# Altium PCB LEDCUBE.PcbDoc (part 2 of 2)
Units mm, origin at the board's own origin, x right, y up, seen from the top; angles counter-clockwise.
Board outline 150 x 150 mm, 2 copper layers (Top Layer, Bottom Layer); 119 components, 223 nets, 564 pads, 151 vias.
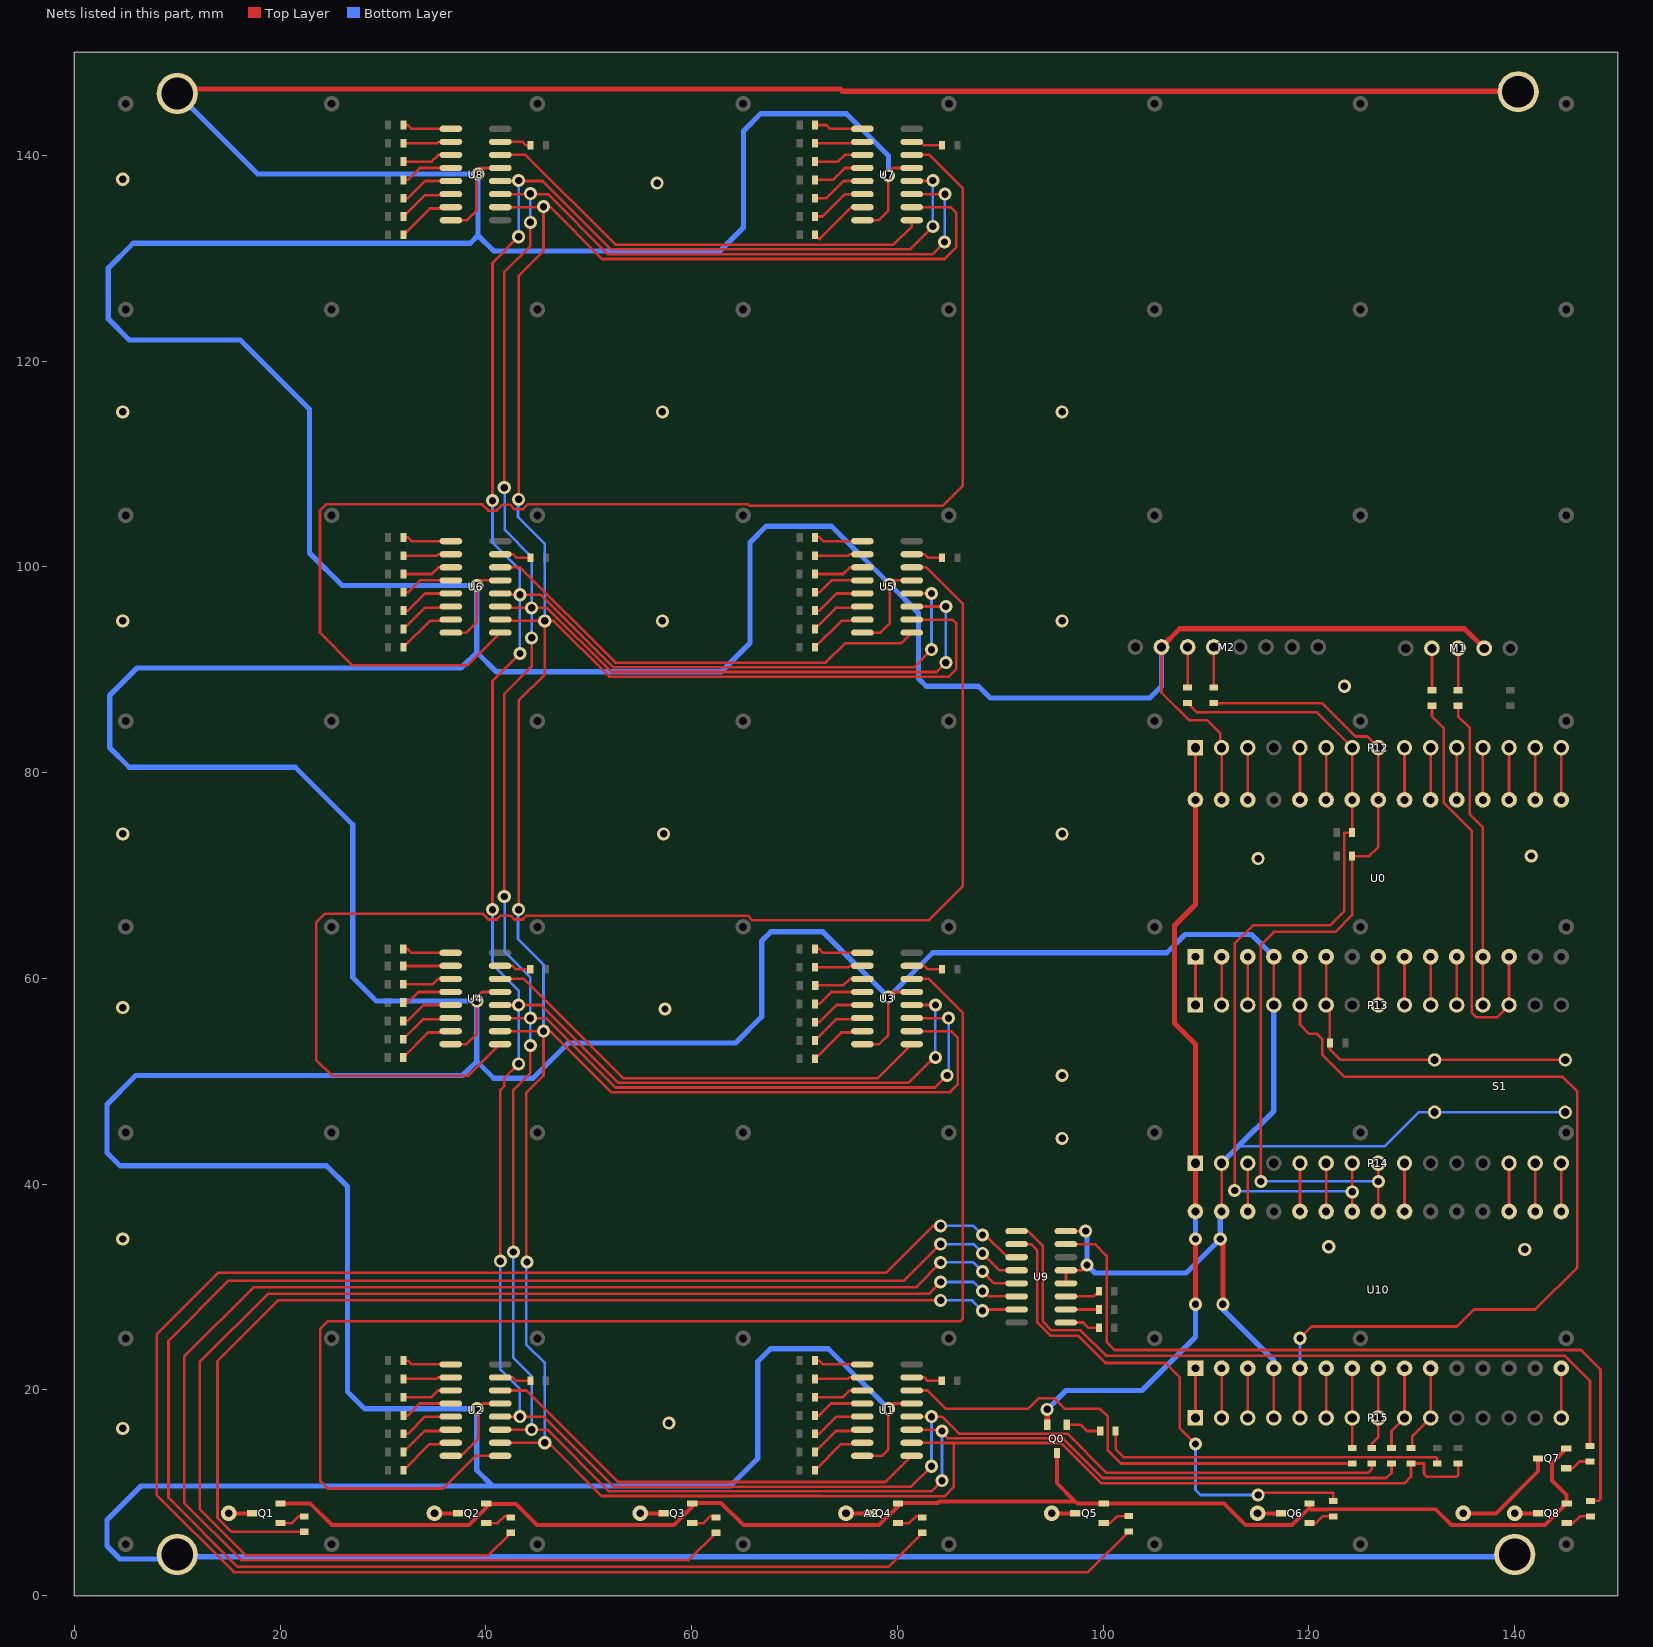
[diagram p2: the nets of this part, all layers, seen from the top]

## Via types
v1: diameter 1.27, hole 0.711, Top Layer to Bottom Layer, tented both sides, 151 vias

## Nets (pads, with @x,y where several pads share a name; then routed paths per layer and width w, separated by ;. In a path a pad name is that pad's centre, name@x,y a point inside that pad or via, vN(x,y) a via of type N, cw(c..) or ccw(c..) an arc to the next point about the centre after c; other vN are vias at no path point) (continued)
GND: M1.4 M2.2 P12.2 P13.4 P14.2 P15.4 pad.0 S1.1 U0.4 U0.29 U1.8 U1.13 U2.8 U2.13 U3.8 U3.13 U4.8 U4.13 U5.8 U5.13 U6.8 U6.13 U7.8 U7.13 U8.8 U8.13 U9.4 U9.5 U9.8 U10.4 U10.29 | length 1189.2
  Top Layer w0.254: U4.8@36.576,53.594 38.1,53.594 39.116,54.61 v1(39.116,57.785) 39.116,58.166 39.624,58.674 U4.13@41.376,58.674 ; U2.8@36.589,13.589 37.592,13.589 39.243,15.24 39.243,18.161 39.751,18.669 U2.13@41.389,18.669 ; U6.8@36.602,93.599 38.1,93.599 39.116,94.615 v1(39.116,98.171) 39.116,98.298 39.497,98.679 U6.13@41.402,98.679 ; U8.8@36.602,133.683 38.179,133.683 39.116,134.62 39.116,138.43 39.449,138.763 U8.13@41.402,138.763 ; U1.8@76.581,13.589 78.486,13.589 79.121,14.224 v1(79.121,18.161) 79.629,18.669 U1.13@81.381,18.669 ; U3.8@76.594,53.594 78.232,53.594 79.121,54.483 v1(79.121,58.166) 79.121,58.293 79.502,58.674 U3.13@81.394,58.674 ; U5.8@76.594,93.599 78.359,93.599 79.248,94.488 v1(79.248,98.298) 79.629,98.679 U5.13@81.394,98.679 ; U7.8@76.594,133.683 78.184,133.683 79.121,134.62 v1(79.121,138.049) 79.121,138.303 79.581,138.763 U7.13@81.394,138.763 ; U9.4@96.38,30.353 U9.5@96.38,31.623 97.917,31.623 v1(98.425,32.131) ; U9.8@96.38,35.433 v1(98.298,35.433) ; M2.2@105.664,92.202 105.664,87.757 108.331,85.09 110.109,85.09 111.379,83.82 111.379,82.55 P12.2@111.506,82.423 ; U10.29@111.506,37.338 P14.2@111.506,42.037 ; U0.29@111.506,77.343 P12.2@111.506,82.169 ; P15.4@116.586,17.272 U10.4@116.586,22.098 ; P13.4@116.586,57.404 U0.4@116.586,62.103
  Top Layer w0.508: pad.0@10,146 10.44,146.44 74.413,146.44 74.637,146.216 140.335,146.216 pad.0@140.335,146.177 ; M2.2@105.664,92.202 107.442,93.98 135.128,93.98 M1.4@137.033,92.075 ; v1@111.379,34.29 111.633,34.036 v1(111.633,28.321)
  Bottom Layer w0.254: 113.03,43.561 113.157,43.688 127.381,43.688 130.683,46.99 S1.1@132.207,46.99 S1.1@144.907,46.99
  Bottom Layer w0.508: pad.0@10,146.216 pad.0@10,146 17.824,138.176 v1(39.243,138.176) 39.243,132.207 ; v1(79.121,18.161) 73.279,24.003 67.675,24.003 66.421,22.749 66.421,13.335 63.754,10.668 40.64,10.668 ; v1(79.121,138.049) 79.121,139.954 75.048,144.027 66.684,144.027 65.024,142.367 65.024,132.969 62.738,130.683 40.767,130.683 39.243,132.207 ; v1(98.298,35.433) 98.425,35.306 v1(98.425,32.131) 99.187,31.369 108.077,31.369 v1(111.379,34.671) 111.379,37.211 U10.29@111.506,37.338 ; M2.2@105.664,92.202 105.664,88.392 104.521,87.249 89.027,87.249 87.884,88.392 82.804,88.392 82.042,89.154 82.042,95.504 v1(79.248,98.298) 73.603,103.943 67.24,103.943 65.659,102.362 65.659,92.583 62.865,89.789 41.021,89.789 39.116,91.694 ; P14.2@111.506,42.037 113.03,43.561 ; v1(111.633,28.321) 111.633,27.813 116.586,22.86 U10.4@116.586,22.098 ; 113.157,43.688 116.586,47.117 P13.4@116.586,57.404 ; U0.4@116.586,62.103 114.427,64.262 107.95,64.262 106.172,62.484 83.439,62.484 v1(79.121,58.166) 72.771,64.516 67.691,64.516 66.802,63.627 66.802,56.261 64.262,53.721 48.006,53.721 44.577,50.292 40.767,50.292 39.116,51.943 ; pad.0@139.134,147.378 pad.0@140.335,146.177 ; pad.0@140,4 140,3.784 10.216,3.784 pad.0@10,4 10,3.556 4.445,3.556 3.175,4.826 3.175,7.366 6.477,10.668 40.64,10.668 ; 39.116,51.943 v1(39.116,57.785) 29.337,57.785 27.051,60.071 27.051,74.93 21.463,80.518 5.334,80.518 3.429,82.423 3.429,87.503 6.096,90.17 37.592,90.17 39.116,91.694 ; 39.116,51.943 37.719,50.546 5.969,50.546 3.175,47.752 3.175,43.053 4.445,41.783 24.511,41.783 26.543,39.751 26.543,19.812 28.194,18.161 v1(39.116,18.161) 39.116,12.192 40.64,10.668 ; 39.116,91.694 v1(39.116,98.171) 26.035,98.171 22.86,101.346 22.86,115.316 16.129,122.047 5.334,122.047 3.302,124.079 3.302,129.032 5.715,131.445 38.481,131.445 39.243,132.207
  other v1: 4.699,16.256 57.785,16.764 140.97,33.655 121.92,33.909 4.699,34.671 96.012,44.45 96.012,50.546 57.404,57.023 4.699,57.15 115.062,71.628 141.605,71.882 4.699,74.041 57.277,74.041 96.012,74.041 123.444,88.392 4.699,94.742 57.15,94.742 96.012,94.742 4.699,115.062 57.15,115.062 96.012,115.062 56.642,137.287 4.699,137.668
INT_DATA: P13.5 P15.5 U0.5 U10.5 | length 91.8
  Top Layer w0.254: P15.5@119.126,17.272 U10.5@119.126,22.098 ; v1(119.126,25.019) 120.269,26.162 134.366,26.162 136.017,27.813 141.986,27.813 146.089,31.916 146.089,48.983 144.653,50.419 123.444,50.419 121.285,52.578 121.285,54.102 120.777,54.61 120.015,54.61 119.126,55.499 P13.5@119.126,57.404 U0.5@119.126,62.103
  Bottom Layer w0.254: U10.5@119.126,22.098 v1(119.126,25.019)
INT_KEY: P13.6 R01.1 S1.2 U0.6 | length 32.8
  Top Layer w0.254: U0.6@121.666,62.103 P13.6@121.666,57.404 122.035,57.035 R01.1@122.035,53.34 ; R01.1@122.047,53.721 122.047,53.086 123.063,52.07 S1.2@132.207,52.07 S1.2@144.907,52.07
L1: A2.1 Q1.2 | length 2.3
  Top Layer w0.381: A2.1@15,8 A2.1@15,8 Q1.2@17.294,8.001
L2: A2.2 Q2.2 | length 2.3
  Top Layer w0.381: A2.2@35,8 A2.2@35,8 Q2.2@37.294,8.001
L3: A2.3 Q3.2 | length 2.3
  Top Layer w0.381: A2.3@55,8 A2.3@55,8 Q3.2@57.294,8.001
L4: A2.4 Q4.2 | length 2.3
  Top Layer w0.381: A2.4@75,8 A2.4@75,8 Q4.2@77.294,8.001
L5: A2.5 Q5.2 | length 2.3
  Top Layer w0.381: A2.5@95,8 A2.5@95,8 Q5.2@97.294,8.001
L6: A2.6 Q6.2 | length 2.3
  Top Layer w0.381: A2.6@115,8 A2.6@115,8 Q6.2@117.294,8.001
L7: A2.7 Q7.2 | length 10.2
  Top Layer w0.381: A2.7@135,8 138.175,8 142.262,12.087 Q7.2@142.262,13.335
L8: A2.8 Q8.2 | length 2.3
  Top Layer w0.381: A2.8@140,8 140.001,8.001 Q8.2@142.294,8.001
L_CTL1: Rl1.2 U9.15 | length 104.9
  Top Layer w0.254: Rl1.2@22.352,6.206 15.254,6.206 13.911,7.549 13.911,22.801 19.812,28.702 v1(84.201,28.702) ; v1(88.265,27.686) 88.265,27.813 U9.15@91.58,27.813
  Bottom Layer w0.254: v1(84.201,28.702) 87.249,28.702 v1(88.265,27.686)
L_CTL2: Rl2.2 U9.14 | length 130.5
  Top Layer w0.254: Rl2.2@42.418,6.108 40.221,3.911 16.663,3.911 12.192,8.382 12.192,22.733 18.796,29.337 83.058,29.337 v1(84.201,30.48) ; v1(88.265,29.591) 88.773,29.083 U9.14@91.58,29.083
  Bottom Layer w0.254: v1(84.201,30.48) 87.376,30.48 v1(88.265,29.591)
L_CTL3: Rl3.2 U9.13 | length 154.9
  Top Layer w0.254: Rl3.2@62.357,6.108 59.706,3.457 16.228,3.457 10.668,9.017 10.668,23.241 17.399,29.972 81.788,29.972 v1(84.201,32.385) ; v1(88.265,31.496) 89.408,30.353 U9.13@91.58,30.353
  Bottom Layer w0.254: v1(84.201,32.385) 87.376,32.385 v1(88.265,31.496)
L_CTL4: Rl4.2 U9.12 | length 180.1
  Top Layer w0.254: Rl4.2@82.423,6.108 79.109,2.794 15.875,2.794 9.144,9.525 9.144,24.765 14.986,30.607 80.645,30.607 v1(84.201,34.163) ; v1(88.265,33.274) 89.916,31.623 U9.12@91.58,31.623
  Bottom Layer w0.254: v1(84.201,34.163) 87.376,34.163 v1(88.265,33.274)
L_CTL5: Rl5.2 U9.11 | length 204.1
  Top Layer w0.254: v1(84.201,35.941) 83.439,35.941 78.867,31.369 13.97,31.369 8.001,25.4 8.001,9.779 15.494,2.286 98.54,2.286 Rl5.2@102.489,6.235 ; v1(88.265,35.052) 88.519,35.052 90.678,32.893 U9.11@91.58,32.893
  Bottom Layer w0.254: v1(84.201,35.941) 87.376,35.941 v1(88.265,35.052)
L_CTL6: Rl6.2 U9.10 | length 51.3
  Top Layer w0.254: U9.10@91.58,34.163 92.964,34.163 93.599,33.528 93.599,26.536 94.862,25.273 97.536,25.273 100.203,22.606 106.045,22.606 107.442,21.209 107.442,16.256 v1(108.966,14.732) ; v1(115.062,9.779) 115.265,9.982 122.352,9.982 Rl6.2@122.352,9.206
  Bottom Layer w0.254: v1(108.966,14.732) 108.966,10.287 109.474,9.779 v1(115.062,9.779)
L_CTL7: Rl7.2 U9.9 | length 72.4
  Top Layer w0.254: U9.9@91.58,35.433 92.71,35.433 94.107,34.036 94.107,26.67 94.996,25.781 97.79,25.781 100.252,23.319 144.845,23.319 147.32,20.844 Rl7.2@147.32,14.54
L_CTL8: Rl8.2 U9.7 | length 75.6
  Top Layer w0.254: U9.7@96.38,34.163 99.187,34.163 100.33,33.02 100.33,24.638 101.092,23.876 146.431,23.876 148.336,21.971 148.336,9.398 148.144,9.206 Rl8.2@147.352,9.206
NetJP1_1: JP1.1 U1.11 U2.11 U3.11 U4.11 U5.11 U6.11 U7.11 U8.11 | length 391.5
  Top Layer w0.254: U4.11@41.376,56.134 v1(44.323,56.134) 45.847,56.134 52.597,49.384 83.674,49.384 v1(84.836,50.546) ; U2.11@41.389,16.129 v1(44.45,16.129) 45.967,16.129 51.955,10.141 83.293,10.141 v1(84.328,11.176) ; U6.11@41.402,96.139 41.529,96.012 v1(44.45,96.012) 45.96,96.012 52.202,89.77 83.801,89.77 v1(84.709,90.678) ; U8.11@41.402,136.223 46.022,136.223 51.87,130.375 83.385,130.375 v1(84.582,131.572) ; v1(41.783,67.945) 41.783,87.63 44.45,90.297 v1(44.45,93.091) ; v1(41.783,107.696) 41.783,128.651 44.323,131.191 v1(44.323,133.477) ; v1(42.672,33.401) 42.672,49.149 44.323,50.8 v1(44.323,53.467) ; U1.11@81.381,16.129 84.074,16.129 84.909,15.294 96.085,15.294 99.949,11.43 127.508,11.43 128.016,11.938 JP1.1@128.016,12.839 ; U3.11@81.394,56.134 v1(84.963,56.134) ; U5.11@81.394,96.139 v1(84.709,96.139) ; U7.11@81.394,136.223 v1(84.63,136.223)
  Bottom Layer w0.254: v1@41.846,68.135 41.846,62.547 44.323,60.071 v1(44.323,56.134) v1(44.323,53.467) ; v1@41.846,107.759 41.846,103.569 44.45,100.965 v1(44.45,96.012) v1(44.45,93.091) ; v1(42.672,33.401) 42.672,23.114 44.45,21.336 v1(44.45,16.129) ; v1(44.323,133.477) v1(44.323,136.271) ; v1(84.328,11.176) v1(84.328,16.002) ; v1(84.582,131.572) 84.582,136.176 v1(84.63,136.223) ; v1(84.709,90.678) v1(84.709,96.139) ; v1(84.836,50.546) 84.982,50.692 84.982,56.115 v1(84.963,56.134)
NetJP2_1: JP2.1 U1.12 U2.12 U3.12 U4.12 U5.12 U6.12 U7.12 U8.12 | length 383.2
  Top Layer w0.254: v1(40.64,66.675) 40.64,88.9 v1(43.307,91.567) ; v1(40.64,106.426) 40.64,129.54 v1(43.18,132.08) ; U4.12@41.376,57.404 v1(43.18,57.404) 45.339,57.404 52.905,49.838 81.08,49.838 83.566,52.324 v1(83.693,52.324) ; U2.12@41.389,17.399 v1(43.307,17.399) 45.586,17.399 52.39,10.595 81.334,10.595 v1(83.312,12.573) ; v1(41.402,32.512) 41.402,49.149 41.783,49.53 41.783,50.292 v1(43.18,51.689) ; U6.12@41.402,97.409 41.529,97.282 v1(43.307,97.282) 45.332,97.282 52.39,90.224 81.588,90.224 v1(83.312,91.948) ; U8.12@41.402,137.493 45.514,137.493 52.153,130.854 81.197,130.854 v1(83.439,133.096) ; U7.12@81.013,137.493 U7.12@81.394,137.493 v1@83.439,137.493 ; U1.12@81.381,17.399 v1(83.312,17.399) 84.328,17.399 85.979,15.748 96.52,15.748 100.33,11.938 125.73,11.938 126.111,12.319 JP2.1@126.111,12.839 ; U3.12@81.394,57.404 v1(83.693,57.404) ; U5.12@81.394,97.409 v1@83.058,97.409
  Bottom Layer w0.254: v1(40.64,66.675) 40.64,61.341 43.18,58.801 v1(43.18,57.404) v1(43.18,51.689) ; v1(40.64,106.426) 40.64,102.362 43.307,99.695 v1(43.307,97.282) v1(43.307,91.567) ; v1(41.402,32.512) 41.402,21.971 43.307,20.066 v1(43.307,17.399) ; v1(43.18,132.08) v1(43.18,137.541) ; v1(83.312,12.573) v1(83.312,17.399) ; v1(83.312,91.948) v1(83.312,97.409) ; v1(83.439,133.096) v1(83.439,137.541) ; v1(83.693,52.324) v1(83.693,57.404)
NetJP3_1: JP3.1 R0.1 U1.10 U2.10 U3.10 U4.10 U5.10 U6.10 U7.10 U8.10 | length 401.8
  Top Layer w0.254: U4.10@41.376,54.864 v1(45.593,54.864) ; U2.10@41.389,14.859 v1(45.72,14.859) 46.08,14.859 51.252,9.687 72.609,9.687 72.644,9.652 78.486,9.652 78.504,9.67 84.6,9.67 85.471,10.541 85.471,14.84 ; U6.10@41.402,94.869 41.529,94.742 v1(45.72,94.742) ; U8.10@41.402,134.953 v1@45.593,134.953 ; v1(43.18,66.675) 43.18,86.995 45.72,89.535 v1(45.72,94.742) ; v1(43.18,106.553) 43.18,128.27 45.593,130.683 v1@45.593,134.953 ; v1(43.99,32.433) 43.911,32.512 43.911,48.864 45.593,50.546 v1(45.593,54.864) ; v1(45.593,135.001) v1@45.593,134.953 ; 46.254,134.953 51.287,129.921 84.582,129.921 85.725,131.064 85.725,134.366 85.138,134.953 U7.10@81.394,134.953 ; U1.10@81.381,14.859 84.201,14.859 84.22,14.84 85.471,14.84 ; U3.10@81.394,54.864 85.217,54.864 85.852,54.229 85.852,49.657 85.125,48.93 52.141,48.93 46.207,54.864 v1(45.593,54.864) ; U5.10@81.394,94.869 85.344,94.869 85.725,94.488 85.725,90.043 84.998,89.316 52.014,89.316 46.588,94.742 v1(45.72,94.742) ; R0.1@134.493,12.839 134.493,11.684 134.366,11.557 131.445,11.557 131.179,11.823 131.179,12.839 JP3.1@129.921,12.839 129.921,11.557 129.286,10.922 99.815,10.922 95.897,14.84 85.471,14.84
  Bottom Layer w0.254: v1@43.116,66.675 43.116,63.817 45.593,61.341 v1(45.593,54.864) ; v1@43.116,106.489 43.116,104.838 45.72,102.235 v1(45.72,94.742) ; v1(43.99,32.433) 43.911,32.354 43.911,24.415 45.72,22.606 v1(45.72,14.859)
NetJP4_1: JP4.1 U1.14 | length 48.5
  Top Layer w0.254: U1.14@81.381,19.939 82.931,19.939 84.709,18.161 92.71,18.161 93.726,19.177 95.25,19.177 96.266,18.161 99.695,18.161 100.457,17.399 100.457,14.097 101.715,12.839 JP4.1@124.206,12.839
NetJP5_1: JP5.1 U9.1 | length 3.4
  Top Layer w0.254: U9.1@96.38,26.543 98.044,26.543 98.552,26.035 JP5.1@99.58,26.035
NetJP6_1: JP6.1 U9.2 | length 3.2
  Top Layer w0.254: U9.2@96.38,27.813 JP6.1@99.58,27.813
NetJP7_1: JP7.1 U9.3 | length 3.4
  Top Layer w0.254: U9.3@96.38,29.083 99.072,29.083 JP7.1@99.58,29.591
NetJP8_1: JP8.1 R02.2 | length 33.9
  Top Layer w0.254: R02.2@101.207,16.002 101.207,14.236 101.977,13.466 132.33,13.466 132.461,13.335 JP8.1@132.461,12.839
NetJP10_1: JP10.1 M1.2 | length 4.1
  Top Layer w0.254: JP10.1@131.953,87.999 M1.2@131.953,92.075
NetJP11_1: JP11.1 M1.3 | length 4.1
  Top Layer w0.254: JP11.1@134.493,87.999 M1.3@134.493,92.075
NetJP12_1: JP12.1 M2.3 | length 3.9
  Top Layer w0.254: JP12.1@108.204,88.253 M2.3@108.204,92.202
NetJP13_1: JP13.1 M2.4 | length 3.9
  Top Layer w0.254: JP13.1@110.744,88.253 M2.4@110.744,92.202
NetP12_3: P12.3 U0.28 | length 4.8
  Top Layer w0.254: U0.28@114.046,77.343 P12.3@114.046,82.169
NetP12_5: P12.5 U0.26 | length 4.8
  Top Layer w0.254: U0.26@119.126,77.343 P12.5@119.126,82.169
NetP12_6: P12.6 U0.25 | length 4.8
  Top Layer w0.254: U0.25@121.666,77.343 P12.6@121.666,82.169
NetP12_9: P12.9 U0.22 | length 4.8
  Top Layer w0.254: U0.22@129.286,77.343 P12.9@129.286,82.169
NetP12_10: P12.10 U0.21 | length 4.8
  Top Layer w0.254: U0.21@131.826,77.343 P12.10@131.826,82.169
NetP12_11: P12.11 U0.20 | length 4.8
  Top Layer w0.254: U0.20@134.366,77.343 P12.11@134.366,82.169
NetP12_12: P12.12 U0.19 | length 4.8
  Top Layer w0.254: U0.19@136.906,77.343 P12.12@136.906,82.169
NetP12_13: P12.13 U0.18 | length 4.8
  Top Layer w0.254: U0.18@139.446,77.343 P12.13@139.446,82.169
NetP12_14: P12.14 U0.17 | length 4.8
  Top Layer w0.254: U0.17@141.986,77.343 P12.14@141.986,82.169
NetP12_15: P12.15 U0.16 | length 4.8
  Top Layer w0.254: U0.16@144.526,77.343 P12.15@144.526,82.169
NetP13_1: P13.1 U0.1 | length 4.7
  Top Layer w0.254: P13.1@108.966,57.404 U0.1@108.966,62.103
NetP13_2: P13.2 U0.2 | length 4.7
  Top Layer w0.254: P13.2@111.506,57.404 U0.2@111.506,62.103
NetP13_3: P13.3 U0.3 | length 4.7
  Top Layer w0.254: P13.3@114.046,57.404 U0.3@114.046,62.103
NetP13_8: P13.8 U0.8 | length 4.7
  Top Layer w0.254: P13.8@126.746,57.404 U0.8@126.746,62.103
NetP13_9: P13.9 U0.9 | length 4.7
  Top Layer w0.254: P13.9@129.286,57.404 U0.9@129.286,62.103
NetP13_10: P13.10 U0.10 | length 4.7
  Top Layer w0.254: P13.10@131.826,57.404 U0.10@131.826,62.103
NetP13_11: P13.11 U0.11 | length 4.7
  Top Layer w0.254: P13.11@134.366,57.404 U0.11@134.366,62.103
NetP14_3: P14.3 U10.28 | length 4.7
  Top Layer w0.254: U10.28@114.046,37.338 P14.3@114.046,42.037
NetP14_5: P14.5 U10.26 | length 4.7
  Top Layer w0.254: U10.26@119.126,37.338 P14.5@119.126,42.037
NetP14_6: P14.6 U10.25 | length 4.7
  Top Layer w0.254: U10.25@121.666,37.338 P14.6@121.666,42.037
NetP14_9: P14.9 U10.22 | length 4.7
  Top Layer w0.254: U10.22@129.286,37.338 P14.9@129.286,42.037
NetP14_13: P14.13 U10.18 | length 4.7
  Top Layer w0.254: U10.18@139.446,37.338 P14.13@139.446,42.037
NetP14_14: P14.14 U10.17 | length 4.7
  Top Layer w0.254: U10.17@141.986,37.338 P14.14@141.986,42.037
NetP14_15: P14.15 U10.16 | length 4.7
  Top Layer w0.254: U10.16@144.526,37.338 P14.15@144.526,42.037
NetP15_1: P15.1 U10.1 | length 4.8
  Top Layer w0.254: P15.1@108.966,17.272 U10.1@108.966,22.098
NetP15_2: P15.2 U10.2 | length 4.8
  Top Layer w0.254: P15.2@111.506,17.272 U10.2@111.506,22.098
NetP15_3: P15.3 U10.3 | length 4.8
  Top Layer w0.254: P15.3@114.046,17.272 U10.3@114.046,22.098
NetP15_6: P15.6 U10.6 | length 4.8
  Top Layer w0.254: P15.6@121.666,17.272 U10.6@121.666,22.098
NetP15_15: P15.15 U10.15 | length 4.8
  Top Layer w0.254: P15.15@144.526,17.272 U10.15@144.526,22.098
NetQ0_1: Q0.1 R02.1 | length 3.5
  Top Layer w0.254: Q0.1@96.454,16.615 97.79,16.615 98.403,16.002 R02.1@99.707,16.002
NetQ1_1: Q1.1 Rl1.1 | length 2.6
  Top Layer w0.254: Q1.1@20.044,7.051 21.145,7.051 21.8,7.706 Rl1.1@22.352,7.706
NetQ2_1: Q2.1 Rl2.1 | length 2.6
  Top Layer w0.254: Q2.1@40.044,7.051 41.145,7.051 41.8,7.706 Rl2.1@42.352,7.706
NetQ3_1: Q3.1 Rl3.1 | length 2.6
  Top Layer w0.254: Q3.1@60.044,7.051 61.145,7.051 61.8,7.706 Rl3.1@62.352,7.706
NetQ4_1: Q4.1 Rl4.1 | length 2.6
  Top Layer w0.254: Q4.1@80.044,7.051 81.145,7.051 81.8,7.706 Rl4.1@82.352,7.706
NetQ5_1: Q5.1 Rl5.1 | length 2.6
  Top Layer w0.254: Q5.1@100.044,7.051 100.671,7.051 101.326,7.706 Rl5.1@102.352,7.706
NetQ6_1: Q6.1 Rl6.1 | length 2.6
  Top Layer w0.254: Q6.1@120.044,7.051 120.671,7.051 121.326,7.706 Rl6.1@122.352,7.706
NetQ7_1: Q7.1 Rl7.1 | length 2.6
  Top Layer w0.254: Q7.1@145.012,12.385 145.639,12.385 146.294,13.04 Rl7.1@147.32,13.04
NetQ8_1: Q8.1 Rl8.1 | length 2.6
  Top Layer w0.254: Q8.1@145.044,7.051 145.671,7.051 146.326,7.706 Rl8.1@147.352,7.706
NetR1_2: R1.2 U1.15 | length 3.1
  Top Layer w0.254: U1.15@81.381,21.209 82.608,21.209 82.941,20.876 R1.2@84.314,20.876
NetR2_2: R2.2 U1.1 | length 4.8
  Top Layer w0.254: R2.2@71.971,22.844 72.398,22.844 72.763,22.479 U1.1@76.581,22.479
NetR3_2: R3.2 U1.2 | length 4.7
  Top Layer w0.254: R3.2@71.971,21.066 75.211,21.066 75.354,21.209 U1.2@76.581,21.209
NetR4_2: R4.2 U1.3 | length 4.9
  Top Layer w0.254: R4.2@71.971,19.288 74.703,19.288 75.354,19.939 U1.3@76.581,19.939
NetR5_2: R5.2 U1.4 | length 5.1
  Top Layer w0.254: R5.2@71.971,17.51 72.398,17.51 73.557,18.669 U1.4@76.581,18.669
NetR6_2: R6.2 U1.5 | length 5.3
  Top Layer w0.254: R6.2@71.971,15.732 72.398,15.732 74.065,17.399 U1.5@76.581,17.399
NetR7_2: R7.2 U1.6 | length 5.5
  Top Layer w0.254: R7.2@71.971,13.954 74.019,16.002 76.454,16.002 U1.6@76.581,16.129
NetR8_2: R8.2 U1.7 | length 5.7
  Top Layer w0.254: R8.2@71.971,12.176 74.527,14.732 76.454,14.732 U1.7@76.581,14.859
NetR9_2: R9.2 U2.15 | length 3.1
  Top Layer w0.254: U2.15@41.389,21.209 42.616,21.209 42.949,20.876 R9.2@44.322,20.876
NetR10_2: R10.2 U2.1 | length 4.8
  Top Layer w0.254: R10.2@31.979,22.844 32.406,22.844 32.771,22.479 U2.1@36.589,22.479
NetR11_2: R11.2 U2.2 | length 4.7
  Top Layer w0.254: R11.2@31.979,21.066 35.219,21.066 35.362,21.209 U2.2@36.589,21.209
NetR12_2: R12.2 U2.3 | length 4.9
  Top Layer w0.254: R12.2@31.979,19.288 34.711,19.288 35.362,19.939 U2.3@36.589,19.939
NetR13_2: R13.2 U2.4 | length 5.1
  Top Layer w0.254: R13.2@31.979,17.51 32.406,17.51 33.565,18.669 U2.4@36.589,18.669
NetR14_2: R14.2 U2.5 | length 5.3
  Top Layer w0.254: R14.2@31.979,15.732 32.406,15.732 34.073,17.399 U2.5@36.589,17.399
NetR15_2: R15.2 U2.6 | length 5.5
  Top Layer w0.254: R15.2@31.979,13.954 34.027,16.002 36.462,16.002 U2.6@36.589,16.129
NetR16_2: R16.2 U2.7 | length 5.7
  Top Layer w0.254: R16.2@31.979,12.176 34.535,14.732 36.462,14.732 U2.7@36.589,14.859
NetR17_2: R17.2 U3.15 | length 3.1
  Top Layer w0.254: U3.15@81.394,61.214 82.621,61.214 82.954,60.881 R17.2@84.327,60.881
NetR18_2: R18.2 U3.1 | length 4.8
  Top Layer w0.254: R18.2@71.984,62.849 72.411,62.849 72.776,62.484 U3.1@76.594,62.484
NetR19_2: R19.2 U3.2 | length 4.7
  Top Layer w0.254: R19.2@71.984,61.071 75.224,61.071 75.367,61.214 U3.2@76.594,61.214
NetR20_2: R20.2 U3.3 | length 4.8
  Top Layer w0.254: R20.2@72.009,59.309 74.732,59.309 75.367,59.944 U3.3@76.594,59.944
NetR21_2: R21.2 U3.4 | length 5.1
  Top Layer w0.254: R21.2@71.984,57.515 72.411,57.515 73.57,58.674 U3.4@76.594,58.674
NetR22_2: R22.2 U3.5 | length 5.3
  Top Layer w0.254: R22.2@71.984,55.737 72.411,55.737 74.078,57.404 U3.5@76.594,57.404
NetR23_2: R23.2 U3.6 | length 5.5
  Top Layer w0.254: R23.2@71.984,53.959 74.032,56.007 76.467,56.007 U3.6@76.594,56.134
NetR24_2: R24.2 U3.7 | length 5.7
  Top Layer w0.254: R24.2@71.984,52.181 74.54,54.737 76.467,54.737 U3.7@76.594,54.864
NetR25_2: R25.2 U4.15 | length 3.1
  Top Layer w0.254: U4.15@41.376,61.214 42.603,61.214 42.936,60.881 R25.2@44.309,60.881
NetR26_2: R26.2 U4.1 | length 4.8
  Top Layer w0.254: R26.2@31.966,62.849 32.393,62.849 32.758,62.484 U4.1@36.576,62.484
NetR27_2: R27.2 U4.2 | length 4.6
  Top Layer w0.254: R27.2@31.966,61.198 35.333,61.198 35.349,61.214 U4.2@36.576,61.214
NetR28_2: R28.2 U4.3 | length 4.8
  Top Layer w0.254: R28.2@31.966,59.42 34.825,59.42 35.349,59.944 U4.3@36.576,59.944
NetR29_2: R29.2 U4.4 | length 5
  Top Layer w0.254: R29.2@31.966,57.642 32.393,57.642 33.425,58.674 U4.4@36.576,58.674
NetR30_2: R30.2 U4.5 | length 5.2
  Top Layer w0.254: R30.2@31.966,55.864 32.393,55.864 33.933,57.404 U4.5@36.576,57.404
NetR31_2: R31.2 U4.6 | length 5.5
  Top Layer w0.254: R31.2@31.966,54.086 33.887,56.007 36.449,56.007 U4.6@36.576,56.134
NetR32_2: R32.2 U4.7 | length 5.7
  Top Layer w0.254: R32.2@31.966,52.308 34.395,54.737 36.449,54.737 U4.7@36.576,54.864
NetR33_2: R33.2 U5.15 | length 3.1
  Top Layer w0.254: U5.15@81.394,101.219 82.621,101.219 82.954,100.886 R33.2@84.327,100.886
NetR34_2: R34.2 U5.1 | length 4.8
  Top Layer w0.254: R34.2@71.984,102.854 R34.2@71.997,102.854 72.411,102.854 72.776,102.489 U5.1@76.594,102.489
NetR35_2: R35.2 U5.2 | length 4.7
  Top Layer w0.254: R35.2@71.984,101.076 75.224,101.076 75.367,101.219 U5.2@76.594,101.219
NetR36_2: R36.2 U5.3 | length 4.9
  Top Layer w0.254: R36.2@71.984,99.298 74.716,99.298 75.367,99.949 U5.3@76.594,99.949
NetR37_2: R37.2 U5.4 | length 5.1
  Top Layer w0.254: R37.2@71.984,97.52 72.411,97.52 73.57,98.679 U5.4@76.594,98.679
NetR38_2: R38.2 U5.5 | length 5.3
  Top Layer w0.254: R38.2@71.984,95.742 72.411,95.742 74.078,97.409 U5.5@76.594,97.409
NetR39_2: R39.2 U5.6 | length 5.5
  Top Layer w0.254: R39.2@71.984,93.964 74.032,96.012 76.467,96.012 U5.6@76.594,96.139
NetR40_2: R40.2 U5.7 | length 5.7
  Top Layer w0.254: R40.2@71.984,92.186 74.54,94.742 76.467,94.742 U5.7@76.594,94.869
NetR41_2: R41.2 U6.15 | length 3.1
  Top Layer w0.254: U6.15@41.402,101.219 42.629,101.219 42.962,100.886 R41.2@44.335,100.886
NetR42_2: R42.2 U6.1 | length 4.8
  Top Layer w0.254: R42.2@31.992,102.854 32.419,102.854 32.784,102.489 U6.1@36.602,102.489
NetR43_2: R43.2 U6.2 | length 4.7
  Top Layer w0.254: R43.2@31.992,101.076 35.232,101.076 35.375,101.219 U6.2@36.602,101.219
NetR44_2: R44.2 U6.3 | length 4.9
  Top Layer w0.254: R44.2@31.992,99.298 34.724,99.298 35.375,99.949 U6.3@36.602,99.949
NetR45_2: R45.2 U6.4 | length 5.1
  Top Layer w0.254: R45.2@31.992,97.52 32.419,97.52 33.578,98.679 U6.4@36.602,98.679
NetR46_2: R46.2 U6.5 | length 5.3
  Top Layer w0.254: R46.2@31.992,95.742 32.419,95.742 34.086,97.409 U6.5@36.602,97.409
NetR47_2: R47.2 U6.6 | length 5.5
  Top Layer w0.254: R47.2@31.992,93.964 34.04,96.012 36.475,96.012 U6.6@36.602,96.139
NetR48_2: R48.2 U6.7 | length 5.7
  Top Layer w0.254: R48.2@31.992,92.186 34.548,94.742 36.475,94.742 U6.7@36.602,94.869
NetR49_2: R49.2 U7.15 | length 3.5
  Top Layer w0.254: U7.15@81.013,141.303 U7.15@81.394,141.303 82.24,141.303 82.573,140.97 R49.2@84.34,140.97
NetR50_2: R50.2 U7.1 | length 4.7
  Top Layer w0.254: R50.2@71.997,142.938 73.089,142.938 73.454,142.573 U7.1@76.594,142.573
NetR51_2: R51.2 U7.2 | length 4.7
  Top Layer w0.254: R51.2@71.997,141.16 76.451,141.16 U7.2@76.594,141.303
NetR52_2: R52.2 U7.3 | length 4.9
  Top Layer w0.254: R52.2@71.997,139.382 74.231,139.382 74.882,140.033 U7.3@76.594,140.033
NetR53_2: R53.2 U7.4 | length 5.1
  Top Layer w0.254: R53.2@71.997,137.604 73.723,137.604 74.882,138.763 U7.4@76.594,138.763
NetR54_2: R54.2 U7.5 | length 5.3
  Top Layer w0.254: R54.2@71.997,135.826 73.088,135.826 74.755,137.493 U7.5@76.594,137.493
NetR55_2: R55.2 U7.6 | length 5.5
  Top Layer w0.254: R55.2@71.997,134.048 72.707,134.048 74.882,136.223 U7.6@76.594,136.223
NetR56_2: R56.2 U7.7 | length 6.1
  Top Layer w0.254: R56.2@71.997,132.27 72.422,131.845 75.531,134.953 U7.7@76.594,134.953
NetR57_2: R57.2 U8.15 | length 3.1
  Top Layer w0.254: U8.15@41.402,141.303 43.575,141.303 43.908,140.97 R57.2@44.335,140.97
NetR58_2: R58.2 U8.1 | length 4.8
  Top Layer w0.254: R58.2@31.992,142.938 32.419,142.938 32.784,142.573 U8.1@36.602,142.573
NetR59_2: R59.2 U8.2 | length 4.7
  Top Layer w0.254: R59.2@31.992,141.16 35.232,141.16 35.375,141.303 U8.2@36.602,141.303
NetR60_2: R60.2 U8.3 | length 4.9
  Top Layer w0.254: R60.2@31.992,139.382 34.724,139.382 35.375,140.033 U8.3@36.602,140.033
NetR61_2: R61.2 U8.4 | length 5.1
  Top Layer w0.254: R61.2@31.992,137.604 32.419,137.604 33.578,138.763 U8.4@36.602,138.763
NetR62_2: R62.2 U8.5 | length 5.3
  Top Layer w0.254: R62.2@31.992,135.826 32.419,135.826 34.086,137.493 U8.5@36.602,137.493
NetR63_2: R63.2 U8.6 | length 5.5
  Top Layer w0.254: R63.2@31.992,134.048 34.04,136.096 36.475,136.096 U8.6@36.602,136.223
NetR64_2: R64.2 U8.7 | length 5.7
  Top Layer w0.254: R64.2@31.992,132.27 34.548,134.826 36.475,134.826 U8.7@36.602,134.953
NetU1_9: U1.9 U2.14 | length 44.7
  Top Layer w0.254: U2.14@41.389,19.939 43.942,19.939 52.832,11.049 78.841,11.049 U1.9@81.381,13.589
NetU2_9: U2.9 U3.14 | length 132.8
  Top Layer w0.254: U2.9@41.389,13.589 38.989,13.589 35.814,10.414 24.638,10.414 23.911,11.141 23.911,25.943 24.638,26.67 86.106,26.67 86.36,26.924 86.36,56.642 83.058,59.944 U3.14@81.394,59.944
NetU3_9: U3.9 U4.14 | length 45.4
  Top Layer w0.254: U4.14@41.376,59.944 43.688,59.944 53.34,50.292 78.092,50.292 U3.9@81.394,53.594
NetU5_9: U5.9 U6.14 | length 45
  Top Layer w0.254: U6.14@41.402,99.949 43.307,99.949 52.578,90.678 73.025,90.678 74.93,92.583 80.378,92.583 U5.9@81.394,93.599
NetU6_9: U6.9 U7.14 | length 132.2
  Top Layer w0.254: U6.9@41.402,93.599 38.227,90.424 27.051,90.424 23.876,93.599 23.876,105.464 24.501,106.089 39.678,106.089 39.678,106.028 40.242,105.464 41.038,105.464 41.619,106.045 42.328,106.045 42.782,105.591 43.578,105.591 44.076,106.089 65.451,106.089 65.622,105.918 84.378,105.918 86.36,107.9 86.36,136.779 83.106,140.033 U7.14@81.394,140.033 U7.14@81.013,140.033
NetU7_9: U7.9 U8.14 | length 44.9
  Top Layer w0.254: U8.14@41.402,140.033 43.863,140.033 52.588,131.308 79.619,131.308 81.394,133.083 U7.9@81.394,133.683
RST: JP3.2 P15.10 U10.10 | length 8.5
  Top Layer w0.254: JP3.2@129.921,14.339 130.048,14.466 130.048,15.494 P15.10@131.826,17.272 U10.10@131.826,22.098
SCL: JP12.2 P12.7 P14.7 R04.1 U0.24 U10.24 | length 86.6
  Top Layer w0.254: JP12.2@108.204,86.753 109.105,85.852 120.777,85.852 P12.7@124.206,82.423 ; v1(112.776,39.37) 112.776,63.373 114.554,65.151 122.047,65.151 123.444,66.548 123.444,74.168 R04.1@124.194,74.168 124.194,77.331 U0.24@124.206,77.343 P12.7@124.206,82.169 ; U10.24@124.194,37.58 124.194,37.326 U10.24@124.206,37.338 v1(124.206,39.243) P14.7@124.206,42.037
  Bottom Layer w0.254: v1(112.776,39.37) 112.849,39.297 124.152,39.297 v1(124.206,39.243)
SDA: JP13.2 P12.8 P14.8 R03.1 U0.23 U10.23 | length 85
  Top Layer w0.254: JP13.2@110.744,86.753 121.273,86.753 124.526,83.5 125.669,83.5 P12.8@126.746,82.423 ; v1(115.316,40.259) 115.316,63.246 116.586,64.516 122.555,64.516 124.194,66.155 R03.1@124.194,71.882 125.857,71.882 126.746,72.771 U0.23@126.746,77.343 P12.8@126.746,82.169 ; U10.23@126.746,37.338 v1(126.746,40.259) P14.8@126.746,42.037
  Bottom Layer w0.254: v1(115.316,40.259) v1(126.746,40.259)
SDIN: JP4.2 P15.7 U10.7 | length 7.8
  Top Layer w0.254: JP4.2@124.206,14.339 P15.7@124.206,17.272 U10.7@124.206,22.098
SHCP: JP1.2 P15.9 U10.9 | length 8.3
  Top Layer w0.254: JP1.2@128.016,14.339 128.016,16.002 P15.9@129.286,17.272 U10.9@129.286,22.098
SR5_INPUT: U4.9 U5.14 | length 132.5
  Top Layer w0.254: U4.9@41.376,53.594 38.328,50.546 25.019,50.546 23.495,52.07 23.495,65.405 24.384,66.294 39.661,66.294 40.242,65.713 41.038,65.713 41.414,66.089 42.406,66.089 42.782,65.713 43.578,65.713 43.954,66.089 65.451,66.089 65.881,65.659 83.058,65.659 86.36,68.961 86.36,96.393 82.804,99.949 U5.14@81.394,99.949
SRX: JP11.2 P13.12 U0.12 | length 30.1
  Top Layer w0.254: JP11.2@134.493,86.499 134.493,85.471 135.636,84.328 135.636,75.946 136.906,74.676 U0.12@136.906,62.103 P13.12@136.906,57.404
STCP: JP2.2 P15.8 U10.8 | length 8
  Top Layer w0.254: JP2.2@126.111,14.339 126.111,14.766 126.746,15.401 P15.8@126.746,17.272 U10.8@126.746,22.098
STX: JP10.2 P13.13 U0.13 | length 40.4
  Top Layer w0.254: JP10.2@131.953,86.499 131.953,85.471 133.096,84.328 133.096,77.073 135.818,74.35 135.817,74.349 135.817,56.696 136.3,56.213 138.255,56.213 P13.13@139.446,57.404 U0.13@139.446,62.103
V_LAY: Q0.2 Q1.3 Q2.3 Q3.3 Q4.3 Q5.3 Q6.3 Q7.3 Q8.3 | length 146.8
  Top Layer w0.381: Q1.3@20.044,8.951 22.926,8.951 25.03,6.847 38.343,6.847 40.044,8.548 Q2.3@40.044,8.724 ; Q2.3@40.044,8.951 Q2.3@40.044,8.724 ; Q3.3@60.044,8.951 Q3.3@60.044,8.663 ; Q4.3@80.044,8.951 Q4.3@80.044,8.729 ; Q0.2@95.504,13.865 95.504,10.922 97.274,9.152 ; Q6.3@120.044,8.951 120.044,8.538 ; Q7.3@145.012,14.285 143.637,12.91 143.637,11.176 145.044,9.769 Q8.3@145.044,8.951 142.941,6.847 133.847,6.847 132.298,8.396 121.765,8.396 121.751,8.382 120.2,8.382 120.044,8.538 ; Q2.3@40.044,8.724 40.21,8.89 42.926,8.89 44.969,6.847 58.282,6.847 60.044,8.609 Q3.3@60.044,8.663 ; Q3.3@60.044,8.663 60.398,9.017 62.865,9.017 65.035,6.847 78.221,6.847 80.044,8.67 Q4.3@80.044,8.729 ; Q4.3@80.044,8.729 80.332,9.017 83.947,9.017 84.082,9.152 97.274,9.152 ; 97.274,9.152 97.475,8.951 Q5.3@100.044,8.951 111.744,8.951 113.847,6.847 118.353,6.847 120.044,8.538
VCC: P12.1 P14.1 Q0.3 U0.30 U10.30 | length 77.6
  Top Layer w0.254: U0.30@108.966,77.343 P12.1@108.966,82.169
  Top Layer w0.508: Q0.3@94.554,16.615 v1(94.554,18.1) ; v1(108.966,28.321) v1(108.966,34.671) ; U10.30@108.966,37.338 P14.1@108.966,42.037 108.966,53.594 106.934,55.626 106.934,65.151 108.966,67.183 U0.30@108.966,77.343
  Bottom Layer w0.508: v1(94.554,18.1) 96.393,19.939 103.759,19.939 108.966,25.146 v1(108.966,28.321) ; v1(108.966,34.671) 108.966,37.084 109.093,37.211 U10.30@108.966,37.338
pads on no net: M1.1 M2.5 M2.6 M2.7 M2.8 U8.9

## Polygon pours and split planes (outlines as drawn)
GND on Top Layer "Top Overlay-No Net" (solid, remove dead copper, pour order 0): 1,1 1,149 149,149 149,1
GND on Bottom Layer "Top Overlay-No Net" (solid, remove dead copper, pour order 2): 149,1 149,149 1,149 1,1

## Keep-outs
Keep-Out Layer:
  lines w0.3: 1,1 149,1 149,149 1,149 1,1

## Silkscreen, mask and mechanical layers (free items; w line width, h text height)
Top Overlay:
  lines w0.254: 98.425,23.495 98.425,30.607 102.235,30.607 102.235,23.495 98.425,23.495 ; 107.188,84.455 115.824,84.455 115.824,89.154 107.188,89.154 107.188,84.455 ; 123.19,10.16 123.19,15.24 130.937,15.24 130.937,10.16 123.19,10.16 ; 127,84.201 127,88.9 135.89,88.9 135.89,84.201 127,84.201 ; 131.445,10.16 131.445,15.24 133.477,15.24 133.477,12.065 133.477,11.938 135.89,11.938 135.89,10.16 131.445,10.16 ; 136.779,84.201 136.779,88.9 142.24,88.9 142.24,84.201 136.779,84.201
  text "LED Cube Project" at 92.71,137.16 h6.6
  text "University of California Santa Barbara  ECE5 Project" at 99.314,134.239 h2.54
  text "Designed by Boning" at 128.016,131.699 h2.54
  text "with teammates Emma Gau, Ran Mo" at 113.665,128.905 h2.54
  text "Feb 8 2017" at 137.414,126.492 h2.03
  text "I2C" at 107.696,84.836 h1.02
  text "RXTX" at 131.318,84.582 h1.02
  text "PWCON" at 137.16,84.582 h1.02
  text "LY" at 99.822,23.876 h1.02
  text "SH" at 128.651,10.541 h1.02
  text "DIM" at 132.842,10.541 h1.02
Mechanical 5:
  the board outline again, w0.254
Drill Drawing:
  text "Drill Drawing." at 153.797,63.881 h1 r90
  text ".LEGEND" at 152.146,1.397 h1

## Dimensions
1,1 to 149,1 on Mechanical 1
1,1 to 1,149 on Mechanical 1